# Altium PCB CIU.PcbDoc (part 2 of 2)
Units mil, origin at the board's own origin, x right, y up, seen from the top; angles counter-clockwise.
Board outline 2900 x 1900 mil, 4 copper layers (Layer 1 Signal Power, Layer 2 GND, Layer 3 GND, Layer 4 Signal), stack 23.756 mil thick; 120 components, 69 nets, 401 pads, 201 vias.
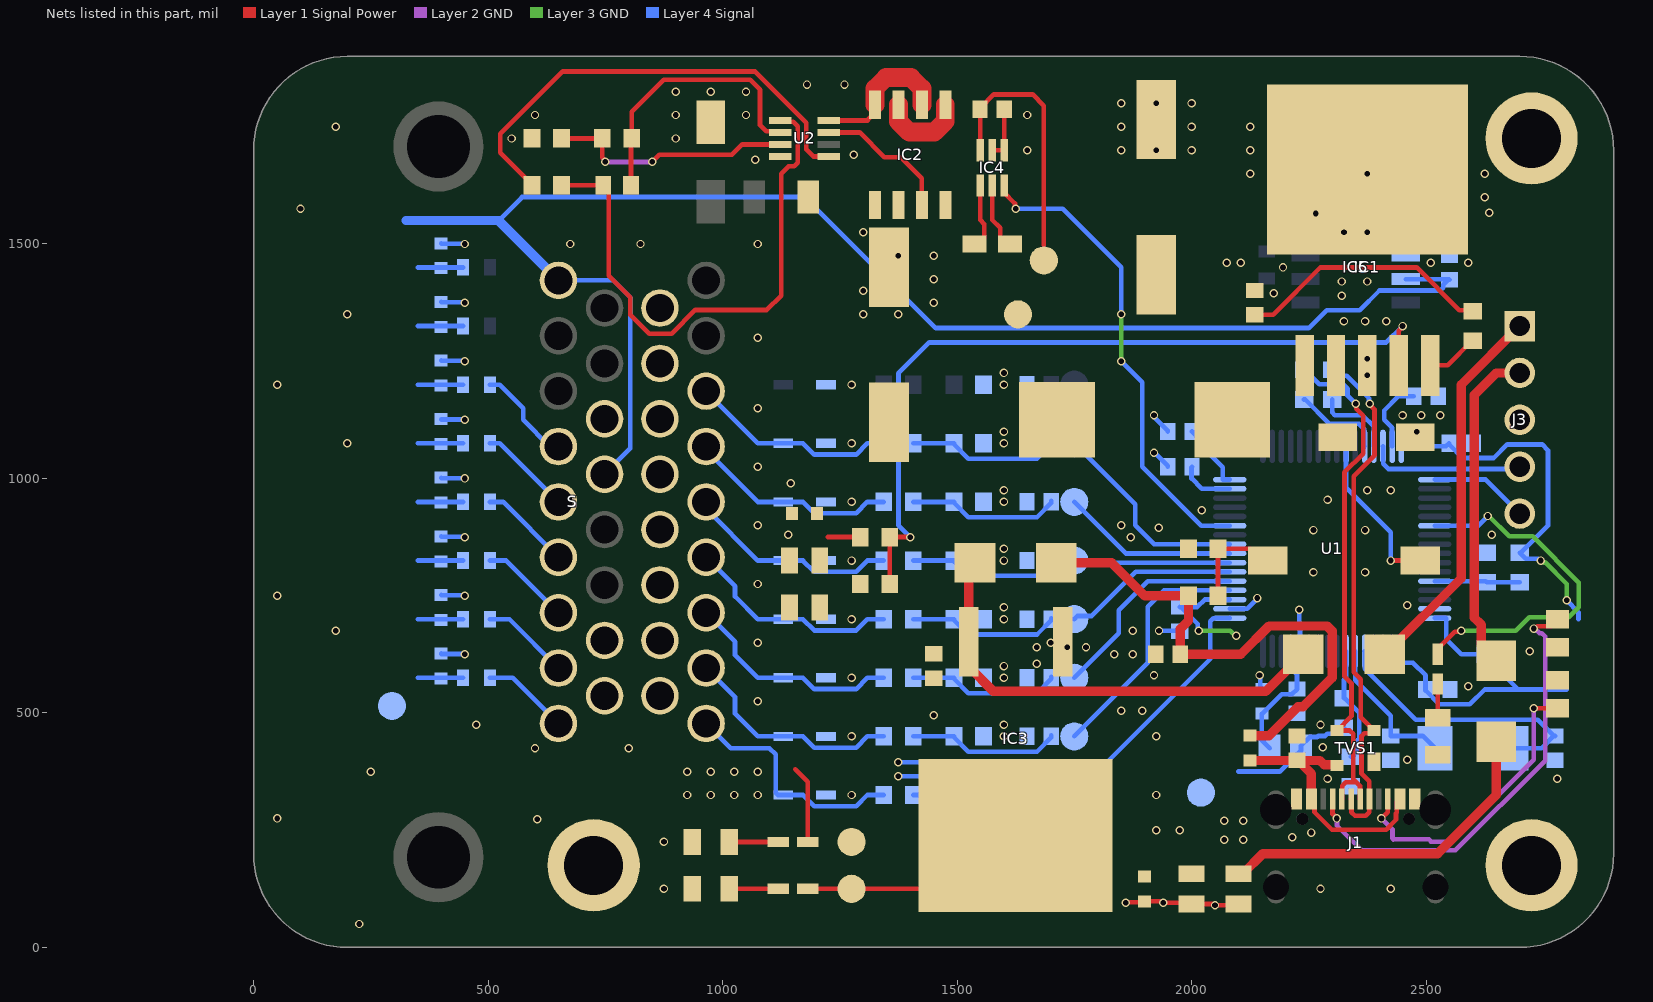
[diagram p4: the nets of this part, all layers, seen from the top]

## Via types
v1: diameter 18, hole 12, Layer 1 Signal Power to Layer 4 Signal, 201 vias

## Nets (pads, with @x,y where several pads share a name; then routed paths per layer and width w, separated by ;. In a path a pad name is that pad's centre, name@x,y a point inside that pad or via, vN(x,y) a via of type N, cw(c..) or ccw(c..) an arc to the next point about the centre after c; other vN are vias at no path point) (continued)
CH1_IN: D3_1.2 R18_1.2 S.3 | length 445.2
  Layer 4 Signal w10: S.3@964.96,1186.22 964.96,1185.04 1075,1075 D3_1.2@1129.25,1075 1171.36,1075 1195.36,1051 1284.94,1051 1308.94,1075 R18_1.2@1343.5,1075
CH1_IN_FLT: C22_1.2 pad.9@1750,1075 R18_1.1 R19_1.2 U1.25 | length 771
  Layer 4 Signal w10: R18_1.1@1406.5,1075 R19_1.2@1493.5,1075 1493.5,1073.03 1524.22,1042.31 1670.46,1042.31 C22_1.2@1700.98,1072.83 ; C22_1.2@1700.98,1075 C22_1.2@1700.98,1077.17 ; pad.9@1750,1075 1880,945 1880,900 1920.16,859.84 U1.25@2081.5,859.84
CH2_A+5V: F4.2 S.29 | length 215.7
  Layer 4 Signal w10: F4.2@503.54,1200 525,1200 575,1150 575,1125 631.89,1068.11 S.29@650,1068.11
CH2_IN: D3_2.2 R18_2.2 S.4 | length 452.1
  Layer 4 Signal w10: S.4@964.96,1068.11 964.96,1060.04 1075,950 D3_2.2@1129.25,950 1171.36,950 1195.36,926 1284.94,926 1308.94,950 R18_2.2@1343.5,950
CH2_IN_FLT: C22_2.2 pad.9@1750,950 R18_2.1 R19_2.2 U1.24 | length 701
  Layer 4 Signal w10: R18_2.1@1406.5,950 R19_2.2@1493.5,950 1493.5,948.03 1524.22,917.31 1670.46,917.31 C22_2.2@1700.98,947.83 ; C22_2.2@1700.98,950 C22_2.2@1700.98,952.17 ; pad.9@1750,950 1859.84,840.16 U1.24@2081.5,840.16
CH3_A+5V: F5.2 S.30 | length 198.2
  Layer 4 Signal w10: F5.2@503.54,1075 525,1075 S.30@650,950
CH3_IN: D3_3.2 R18_3.2 S.5 | length 459
  Layer 4 Signal w10: S.5@964.96,950 964.96,935.04 1075,825 D3_3.2@1129.25,825 1171.36,825 1195.36,801 1284.94,801 1308.94,825 R18_3.2@1343.5,825
CH3_IN_FLT: C22_3.2 pad.9@1750,825 R18_3.1 R19_3.2 U1.23 | length 657.4
  Layer 4 Signal w10: R18_3.1@1406.5,825 R19_3.2@1493.5,825 1493.5,823.03 1524.22,792.31 1670.46,792.31 C22_3.2@1700.98,822.83 ; C22_3.2@1700.98,825 C22_3.2@1700.98,827.17 ; pad.9@1750,825 1754.53,820.47 U1.23@2081.5,820.47
CH4_A+5V: F6.2 S.31 | length 195.4
  Layer 4 Signal w10: F6.2@503.54,950 531.89,950 S.31@650,831.89
CH4_IN: D3_4.2 R18_4.2 S.6 | length 465.9
  Layer 4 Signal w10: S.6@964.96,831.89 1026.68,770.17 1026.68,748.32 1075,700 D3_4.2@1129.25,700 1171.36,700 1195.36,676 1284.94,676 1308.94,700 R18_4.2@1343.5,700
CH4_IN_FLT: C22_4.2 pad.9@1750,700 R18_4.1 R19_4.2 U1.22 | length 697.2
  Layer 4 Signal w10: R18_4.1@1406.5,700 R19_4.2@1493.5,700 1493.5,698.03 1524.22,667.31 1670.46,667.31 C22_4.2@1700.98,697.83 ; C22_4.2@1700.98,700 C22_4.2@1700.98,702.17 ; pad.9@1750,700 1756.82,706.82 1786.82,706.82 1880.79,800.79 U1.22@2081.5,800.79
CH5_A+5V: F7.2 S.32 | length 192.5
  Layer 4 Signal w10: F7.2@503.54,825 538.78,825 S.32@650,713.78
CH5_IN: D3_5.2 R18_5.2 S.7 | length 472.7
  Layer 4 Signal w10: S.7@964.96,713.78 1026.68,652.06 1026.68,623.32 1075,575 D3_5.2@1129.25,575 1171.36,575 1195.36,551 1284.94,551 1308.94,575 R18_5.2@1343.5,575
CH5_IN_FLT: C22_5.2 pad.9@1750,575 R18_5.1 R19_5.2 U1.21 | length 769.6
  Layer 4 Signal w10: R18_5.1@1406.5,575 R19_5.2@1493.5,575 1493.5,573.03 1524.22,542.31 1670.46,542.31 C22_5.2@1700.98,572.83 ; C22_5.2@1700.98,575 C22_5.2@1700.98,577.17 ; pad.9@1750,575 1845,670 1845,719.02 1907.09,781.1 U1.21@2081.5,781.1
CH6_A+5V: F8.2 S.33 | length 189.7
  Layer 4 Signal w10: F8.2@503.54,700 545.67,700 S.33@650,595.67
CH6_IN: D3_6.2 R18_6.2 S.8 | length 479.6
  Layer 4 Signal w10: S.8@964.96,595.67 1026.68,533.95 1026.68,498.32 1075,450 D3_6.2@1129.25,450 1171.36,450 1195.36,426 1284.94,426 1308.94,450 R18_6.2@1343.5,450
CH6_IN_FLT: C22_6.2 pad.9@1750,450 R18_6.1 R19_6.2 U1.20 | length 854.8
  Layer 4 Signal w10: R18_6.1@1406.5,450 R19_6.2@1493.5,450 1493.5,448.03 1524.22,417.31 1670.46,417.31 C22_6.2@1700.98,447.83 ; C22_6.2@1700.98,450 C22_6.2@1700.98,452.17 ; pad.9@1750,450 1906.6,606.6 1906.6,726.6 1941.42,761.42 U1.20@2081.5,761.42
CH7_A+5V: F9.2 S.34 | length 186.8
  Layer 4 Signal w10: F9.2@503.54,575 552.56,575 S.34@650,477.56
CH7_IN: D3_7.2 R18_7.2 S.9 | length 509.7
  Layer 4 Signal w10: S.9@964.96,477.56 1017.52,425 1100,425 1113.09,411.91 1113.09,329.84 1117.93,325 D3_7.2@1129.25,325 1171.36,325 1195.36,301 1284.94,301 1308.94,325 R18_7.2@1343.5,325
CH7_IN_FLT: C22_7.2 pad.9@1750,325 R18_7.1 R19_7.2 U1.17 | length 859
  Layer 4 Signal w10: R18_7.1@1406.5,325 R19_7.2@1493.5,325 1493.5,323.03 1524.22,292.31 1670.46,292.31 C22_7.2@1700.98,322.83 ; C22_7.2@1700.98,325 C22_7.2@1700.98,327.17 ; pad.9@1750,325 2040,615 2040,695.6 2046.42,702.02 2081.15,702.02 U1.17@2081.5,702.36
CURR_SENSE: IC4.6 U1.27 | length 1019.1
  Layer 1 Signal Power w10: IC4.6@1600.59,1625 1600.59,1609.25 1623.47,1586.37 1623.47,1576.53 v1(1625,1575)
  Layer 3 GND w10: v1(1850,1250) v1(1850,1350)
  Layer 4 Signal w10: v1(1625,1575) 1725,1575 1850,1450 v1(1850,1350) ; v1(1850,1250) 1895,1205 1895,1025 2020.79,899.21 U1.27@2081.5,899.21
D+3.3V: C1.2 C2.2 C3.2 C4.2 C5.2 C19.2 C20.2 C21.2 D6.1 FB1.2 IC3.4 LED1.2 pad.9@1275,125 pad.9@2020,330 R3.2 R6.1 U1.1 U1.19 U1.32 U1.48 U1.64 | length 3418.5
  Layer 1 Signal Power w10: LED1.2@1181.5,125 1511.42,125 IC3.4@1625,238.58
  Layer 1 Signal Power w20: C19.2@2100,157.28 2109.45,157.28 2152.17,200 2525,200 2650,325 D6.1@2650,438.39
  Layer 3 GND w10: v1(2015,675) 2082.84,675 2092.84,665 v1(2095,665) ; v1(2745,825) 2747.16,825 2751.16,821 2754,821 2800,775 v1(2800,740)
  Layer 4 Signal w10: C1.2@1975,725.98 C1.2@1977.17,725.98 ; C5.2@2000.98,1100 2012.32,1088.66 2012.32,1077.68 2066.45,1023.55 2066.45,998.47 2067.28,997.64 U1.32@2081.5,997.64 ; v1(2015,675) 2013.47,676.53 2013.47,689.68 C1.2@1977.17,725.98 ; U1.19@2081.5,741.73 2027.87,741.73 2012.12,725.98 C1.2@1977.17,725.98 ; 2100,375 2188.39,375 2233.46,420.08 FB1.2@2233.46,425 2233.46,429.92 2252.09,448.54 2267.6,448.54 2270.06,451 2284.94,451 2289.73,455.79 2312.28,455.79 R3.2@2325,468.5 ; U1.1@2447.64,631.5 2447.64,607.81 2448.47,606.97 2472.17,606.97 2499.02,580.12 C2.2@2499.02,550 2499.02,547.83 2528.35,518.5 2593.5,518.5 2625,550 2696.85,550 ; U1.48@2447.64,1068.5 2542.52,1068.5 C4.2@2549.02,1075 2549.02,1072.83 2578.35,1043.5 2643.95,1043.5 2672.94,1072.48 2747.52,1072.48 2760,1060 2760,899.53 2701.97,841.5 R6.1@2700,841.5 2712.72,828.78 2739.06,828.78 2742.84,825 v1(2745,825) ; U1.64@2518.5,702.36 2542.2,702.36 2543.03,701.53 2543.03,656.97 2575,625 C3.2@2624.02,625 2624.02,622.83 2696.85,550 ; 2800,550 2696.85,550 ; v1(2800,740) 2825,715 2825,700
  other v1: 2070,230 2110,230 2070,270 2110,270
D+3.3V_JTAG: D6.2 J3.2 | length 702.3
  Layer 1 Signal Power w20: D6.2@2650,611.61 2617.68,643.94 2617.68,688.32 2603,703 2603,1178 2650,1225 J3.2@2700,1225
D+5V: C14.1 C15.2 C16.2 C17.2 C18.2 C26.2 C27.2 C28.2 C29.2 C30.2 C31.2 C32.2 C33.2 C35.1 D4.1 D5.1 F2.1 F3.1 F4.1 F5.1 F6.1 F7.1 F8.1 F9.1 IC3.3 IC5.3 L1.2 LED2.2 pad.9@295,515 pad.9@1275,225 R11.2 S.21 S.26 | length 5251
  Layer 1 Signal Power w10: 1155,380 1181.5,353.5 LED2.2@1181.5,225 ; 1225,875 R11.2@1293.5,875
  Layer 1 Signal Power w20: D4.1@1538.39,820 1525,806.61 IC3.3@1525,651.97 1525,598.82 1577.82,546 2158.4,546 2237.4,625 D5.1@2238.39,625
  Layer 4 Signal w10: 350,575 F9.1@446.46,575 ; 350,700 F8.1@446.46,700 ; 350,825 F7.1@446.46,825 ; 350,950 F6.1@446.46,950 ; 350,1075 F5.1@446.46,1075 ; 350,1200 F4.1@446.46,1200 ; 350,1325 F3.1@446.46,1325 ; 350,1450 F2.1@446.46,1450 ; 522.44,1550 572.44,1600 1175,1600 1454.34,1320.66 2250.09,1320.66 2288.43,1359 2359,1359 2400.8,1400.8 2530.64,1400.8 2536.5,1406.65 2536.5,1412.68 2547.83,1424.02 C35.1@2550,1424.02 2549.02,1425 IC5.3@2456.77,1425 ; S.26@650,1422.44 767.15,1422.44 803.43,1386.17 803.43,1064.06 S.21@748.43,1009.06
  Layer 4 Signal w20: 325,1550 522.44,1550 S.26@650,1422.44
  other v1: 925,325 975,325 1025,325 1075,325 925,375 975,375 1025,375 1075,375
D+5V_JTAG: D5.2 J3.1 | length 820
  Layer 1 Signal Power w20: D5.2@2411.61,625 2412.6,625 2575,787.4 2575,1200 J3.1@2700,1325
D+5V_USB: C24.2 D4.2 FB2.2 R22.2 | length 1121.7
  Layer 1 Signal Power w20: D4.2@1711.61,820 1830,820 1900,750 R22.2@1993.5,750 1993.5,696.5 1975.98,678.98 C24.2@1975.98,625 2105,625 2165.32,685.32 2289.15,685.32 2299.69,674.78 2299.69,575.22 2237.87,513.4 2227.12,513.4 2165.29,451.57 FB2.2@2125,451.57
D+12V: C12.1 C13.2 C25.2 IC1.1 IC4.3 IC4.5 pad.9@1685,1465 R7.1 R8.2 | length 1235.4
  Layer 1 Signal Power w10: IC4.3@1549.41,1699.8 1549.41,1787.01 C25.2@1549.02,1787.4 1549.02,1789.57 1578.35,1818.91 1661.09,1818.91 1685,1795 1685,1498 ; IC4.5@1575,1625 1575,1551.19 1591.81,1534.38 1591.81,1513.11 1604.92,1500 R8.2@1612.4,1500 ; C13.2@2135,1349.02 2174.02,1349.02 2275,1450 2480,1450 2571.17,1358.83 2597.67,1358.83 R7.1@2600,1356.5
GND: C1.1 C2.1 C3.1 C4.1 C5.1 C6.1 C7.1 C8.2 C9.2 C10.1 C11.1 C12.2 C13.1 C14.2 C15.1 C16.1 C17.1 C18.1 C19.1 C20.1 C21.1 C22_0.1 C22_1.1 C22_2.1 C22_3.1 C22_4.1 C22_5.1 C22_6.1 C22_7.1 C23.1 C24.1 C25.1 C26.1 C27.1 C28.1 C29.1 C30.1 C31.1 C32.1 C33.1 C35.2 D1.1 D2.2 D3_0.1 D3_1.1 D3_2.1 D3_3.1 D3_4.1 D3_5.1 D3_6.1 D3_7.1 IC1.3 IC1.6 IC3.1 IC4.1 IC4.2 IC5.2 IC5.8 J1.A1-B12 J1.B1-A12 J3.3 pad.8 pad.9@1630,1350 R4.2 R5.1 R13.1 R14.1 R15.1 R16.1 R17.1 R19_0.1 R19_1.1 R19_2.1 R19_3.1 R19_4.1 R19_5.1 R19_6.1 R19_7.1 R20.1 R21.1 R23.2 S.10 S.11 S.12 S.13 S.14 S.15 S.16 S.17 S.20 S.24 S.25 TVS1.1 U1.12 U1.18 U1.63 U2.4 | length 1590.7
  Layer 1 Signal Power w10: IC4.2@1575,1699.8 IC4.1@1600.59,1699.8 1600.59,1787.01 C25.1@1600.98,1787.4 ; v1(1860,95) 1861.53,96.53 1898.11,96.53 C21.1@1900,98.43 1934.41,98.43 1937.84,95 v1(1940,95) 1997.72,95 C20.1@2000,92.72 2045.12,92.72 2047.84,90 v1(2050,90) 2097.28,90 C19.1@2100,92.72
  Layer 4 Signal w10: C33.1@400,626.57 400.79,625.79 449.21,625.79 v1(450,625) ; C32.1@400,751.57 400.79,750.79 449.21,750.79 v1(450,750) ; C31.1@400,876.57 400.79,875.79 449.21,875.79 v1(450,875) ; C30.1@400,1001.57 400.79,1000.79 449.21,1000.79 v1(450,1000) ; C29.1@400,1126.57 400.79,1125.79 449.21,1125.79 v1(450,1125) ; C28.1@400,1251.57 400.79,1250.79 449.21,1250.79 v1(450,1250) ; C27.1@400,1376.57 400.79,1375.79 449.21,1375.79 v1(450,1375) ; C26.1@400,1501.57 400.79,1500.79 449.21,1500.79 v1(450,1500) ; v1(1375,365) 1518.46,365 1556.5,326.97 R19_7.1@1556.5,325 ; v1(1375,395) 1579.02,395 1635.51,338.5 1637.68,338.5 1649.02,327.17 C22_7.1@1649.02,325 ; v1(1920,1055) 1921.18,1055 1949.02,1027.17 C11.1@1949.02,1025 ; v1(1920,1135) 1921.53,1133.47 1921.53,1129.65 1949.02,1102.17 C5.1@1949.02,1100 ; v1(1930.6,675) 1974.02,675 C1.1@1975,674.02 ; U1.18@2081.5,722.05 2081.84,722.39 2118.42,722.39 2140,743.97 v1(2140,745) ; v1(2145,580) 2146.53,578.47 2146.53,555.04 C6.1@2150,551.57 ; v1(2230,720) 2230,689.46 2231.1,688.36 U1.12@2231.1,631.5
  other v1: 225,50 875,125 2275,125 2425,125 875,225 2215,235 2255,245 1925,250 1975,250 604.51,273.21 50,275 1275,325 1925,325 2290,360 2780,360 250,375 2460,400 600,425 800,425 2280,427 1275,450 1600,450 1925,450 475,475 1600,475 2275,475 1450,495 1850,505 1895,505 1075,525 2590,557.24 1275,575 1600,575 1920,580 1600,600 1670,605 1835,625 1875,625 2721.26,631.3 1670,640 1735,640 1775,640 1075,650 1700,650 175,675 1875,675 1275,700 1600,700 1600,725 2460,730 50,750 1075,775 2260,800 2370,800 1275,825 1600,825 1600,850 1870,875 1140,880 2640,880 2260,890 2370,890 1930,895 1075,900 1850,900 2021.97,931.97 1275,950 1600,950 2290,955 1600,975 2375,975 2425,975 1145,990 1075,1025 200,1075 1275,1075 1600,1075 1600,1100 2480,1100 2450,1135 2490,1135 2530,1135 1075,1150 50,1200 1275,1200 1600,1200 2375,1220 1600,1225 2375,1255 1075,1300 2325,1335 2370,1335 2415,1335 200,1350 1300,1350 1375,1350 1450,1375 2320,1390 2175,1395 1300,1400 2320,1420 2375,1420 1450,1425 2195,1450 2075,1460 2105,1460 2510,1460 2590,1460 1375,1475 1450,1475 675,1500 825,1500 1075,1500 1300,1525 2325,1525 2375,1525 2265,1565 2634.93,1567 100,1575 2625,1600 2125,1650 2375,1650 2625,1650 1070,1680 1280,1690 1650,1700 1850,1700 1925,1700 2000,1700 2125,1700 550,1725 900,1725 175,1750 1850,1750 2000,1750 2125,1750 600,1775 900,1775 1050,1775 1650,1775 1850,1800 1925,1800 2000,1800 900,1825 975,1825 1050,1825 1180,1840 1260,1840
NetC6_2: C6.2 C7.2 FB1.1 U1.13 | length 263.2
  Layer 4 Signal w10: FB1.1@2166.54,425 2150,441.54 C6.2@2150,498.43 2150.98,498.43 2192.2,539.65 2213.66,539.65 C7.2@2225,550.98 2225,581.33 2211.76,594.57 2211.76,631.15 U1.13@2211.42,631.5
NetC8_1: C8.1 U1.5 X1.2 | length 605.2
  Layer 4 Signal w10: U1.5@2368.9,631.5 2369.24,631.15 2369.24,594.57 2478.57,485.24 2738.57,485.24 C8.1@2772.83,450.98 ; X1.2@2680.71,425 2746.85,425 C8.1@2772.83,450.98 ; C8.1@2775,450.98 C8.1@2772.83,450.98
NetC9_1: C9.1 U1.6 X1.1 | length 317
  Layer 4 Signal w10: U1.6@2349.21,631.5 2349.21,569.79 2425,494.01 C9.1@2425,450.98 2493.31,450.98 X1.1@2519.29,425
NetC10_2: C10.2 U1.47 | length 158.9
  Layer 4 Signal w10: U1.47@2427.95,1068.5 2427.61,1068.85 2427.61,1108.45 2411,1125.06 2411,1144.94 2441.06,1175 C10.2@2474.02,1175
NetC11_2: C11.2 U1.31 | length 116
  Layer 4 Signal w10: C11.2@2000.98,1025 2000,1024.02 2000,1000 2022.05,977.95 U1.31@2081.5,977.95
NetD2_1: D2.1 IC1.2 L1.1
NetF1_1: F1.1 IC2.5 IC2.6 R9.2 R10.2 U2.1 | length 1186.3
  Layer 1 Signal Power w10: R10.2@656.5,1625 R9.2@745.47,1625 757.2,1613.27 757.2,1432.39 803.43,1386.17 803.43,1348.71 843.75,1308.39 891.23,1308.39 942.18,1359.33 1094.33,1359.33 1125,1390 1125,1650 1140.74,1665.74 1152.83,1665.74 1160.44,1673.36 1160.44,1751.05 1150.98,1760.51 1126.3,1760.51 U2.1@1123.43,1763.39
NetIC1_4: IC1.4 R11.1 R14.2 | length 1706.9
  Layer 1 Signal Power w10: R14.2@1356.5,775 R11.1@1356.5,875 v1(1400,875) ; IC1.4@2441.93,1241.34 2441.93,1315.45 2450,1323.52 v1(2450,1325)
  Layer 4 Signal w10: v1(1400,875) 1375,900 1375,1224.29 1440.71,1290 2415,1290 v1(2450,1325)
NetIC1_5: IC1.5 R7.2 | length 112.7
  Layer 1 Signal Power w10: IC1.5@2508.86,1241.34 2545.87,1241.34 2598.03,1293.5 R7.2@2600,1293.5
NetIC2_1: IC2.1 IC2.3 | length 189
  Layer 1 Signal Power w40: IC2.3@1375,1796.77 1375,1761.98 1398.43,1738.54 1451.57,1738.54 1475,1761.98 IC2.1@1475,1796.77
NetIC2_2: IC2.2 IC2.4 U2.8 | length 311.3
  Layer 1 Signal Power w10: U2.8@1226.57,1763.39 1308.84,1763.39 1325,1779.55 IC2.4@1325,1796.77
  Layer 1 Signal Power w40: IC2.4@1325,1796.77 1325,1831.57 1348.43,1855 1401.57,1855 1425,1831.57 IC2.2@1425,1796.77
NetJ1_A5: J1.A5 R20.2 | length 958.8
  Layer 1 Signal Power w10: J1.A5@2300.79,316.34 2300.79,284.55 2310,275.34 v1(2310,275) ; v1(2730,680) 2732.16,680 2737.01,684.84 2765.31,684.84 R20.2@2780,699.53
  Layer 2 GND w10: v1(2310,275) 2310,260 2362.73,207.27 2562.73,207.27 2754,398.54 2754,662.99 2746.93,670.06 2742.11,670.06 2732.16,680 v1(2730,680)
NetJ1_B5: J1.B5 R21.2 | length 636.2
  Layer 1 Signal Power w10: v1(2405,275) 2405,275.2 2418.12,288.32 2418.12,315.56 J1.B5@2418.9,316.34 ; v1(2730,510) 2779.53,510 R21.2@2780,510.47
  Layer 2 GND w10: v1(2405,275) 2428.47,251.53 2428.47,232.8 2430,231.27 ; 2430,230 2430.64,230.64 2506.3,230.64 2510,226.94 2510,226.3 ; 2510,225.27 2555.27,225.27 2730,400 v1(2730,510)
NetLED1_1: LED1.1 R15.2 | length 104.1
  Layer 1 Signal Power w10: R15.2@1014.37,125 LED1.1@1118.5,125
NetLED2_1: LED2.1 R16.2 | length 104.1
  Layer 1 Signal Power w10: R16.2@1014.37,225 LED2.1@1118.5,225
NetLED3_1: "D2 LED.1" R17.2 | length 72.6
  Layer 1 Signal Power w10: R17.2@2525,489.37 2525,562.01
NetLED3_2: "D2 LED.2" U1.54 | length 776.9
  Layer 1 Signal Power w10: 2525,625 2525,636.81 2561.66,673.47 2573.47,673.47 v1(2575,675)
  Layer 3 GND w10: v1(2575,675) 2691.06,675 2720.06,704 2804,704 2825.86,725.86 2825.86,778.08 2727.24,876.71 2677.24,876.71 2633.94,920 v1(2632,920)
  Layer 4 Signal w10: U1.54@2518.5,899.21 2611.77,899.21 2632,919.44 v1(2632,920)
NetR3_1: R3.1 R5.2 U1.7 | length 250
  Layer 4 Signal w10: U1.7@2329.53,631.5 2329.53,575.11 2325,570.58 R3.1@2325,531.5 2326.97,531.5 2357.69,500.78 2357.69,445.4 2354.69,442.4 2354.69,419.21 2341.97,406.5 R5.2@2340,406.5
NetR4_1: R4.1 R6.2 U1.60 | length 182.6
  Layer 4 Signal w10: U1.60@2518.5,781.1 2627.4,781.1 R4.1@2630,778.5 R6.2@2700,778.5
NetR9_1: R9.1 R12.2 U2.2 | length 593.2
  Layer 1 Signal Power w10: R9.1@804.53,1625 804.53,1723.03 R12.2@806.5,1725 806.5,1781.5 875,1850 1058.94,1850 1080,1828.94 1080,1753.6 1093.06,1740.54 1120.68,1740.54 U2.2@1123.43,1737.8
NetR10_1: R10.1 U2.5 | length 1002.2
  Layer 1 Signal Power w10: R10.1@593.5,1625 593.5,1626.97 526,1694.47 526,1734.94 659.06,1868 1069.09,1868 1178.44,1758.64 1178.44,1701.56 1193.39,1686.61 U2.5@1226.57,1686.61
NetR12_1: R12.1 R13.2 U2.3 | length 528.5
  Layer 1 Signal Power w10: R13.2@656.5,1725 R12.1@743.5,1725 743.5,1683.66 750,1677.16 v1(750,1675) ; v1(850,1675) 865,1690 1020,1690 1042.2,1712.2 U2.3@1123.43,1712.2
  Layer 2 GND w10: v1(750,1675) v1(850,1675)
NetR22_1: R22.1 R23.1 S1.2 | length 216.5
  Layer 1 Signal Power w10: R22.1@2056.5,750 R23.1@2056.5,850 2124.8,850 2149.8,825 S1.2@2162.6,825
SWCLK: J3.5 U1.49 | length 211.6
  Layer 4 Signal w10: U1.49@2518.5,997.64 2627.36,997.64 J3.5@2700,925
SWDIO: J3.4 U1.46 | length 335.3
  Layer 4 Signal w10: U1.46@2408.27,1068.5 2408.61,1068.16 2408.61,1031.58 2420.12,1020.07 2695.07,1020.07 J3.4@2700,1025
USB1_D_N: J1.A7 J1.B7 R1.1 TVS1.3 | length 1131.6
  Layer 1 Signal Power w10: J1.B7@2320.47,316.34 2321.25,317.12 2321.25,344.36 2328.87,351.98 2351.45,351.98 ; v1(2350,1158.94) 2351.53,1157.41 2351.53,1148.47 2366.15,1133.85 2366.15,1052.95 2326,1012.8 2326,578.32 2341,563.32 2341,492.77 TVS1.3@2310.63,462.4 2337.6,462.4 2344.59,455.41 2344.59,358.83 2351.45,351.98 ; J1.A7@2359.84,316.34 2359.06,317.12 2359.06,344.36 2351.45,351.98
  Layer 4 Signal w10: R1.1@2240,1231.5 2241.97,1231.5 2272.69,1200.78 2323.51,1200.78 2332.69,1191.61 2332.69,1176.25 v1(2350,1158.94)
USB1_D_P: J1.A6 J1.B6 R2.1 TVS1.2 | length 1127
  Layer 1 Signal Power w10: J1.A6@2340.16,316.34 2340.94,315.56 2340.94,288.32 2348.55,280.7 2371.13,280.7 2378.75,288.32 2378.75,315.56 J1.B6@2379.53,316.34 2379.02,316.85 2379.02,353.98 2362.59,370.4 2362.59,450.66 2368.45,456.52 2383.49,456.52 TVS1.2@2389.37,462.4 2361,490.77 2361,571.6 2346,586.6 2346,1004.52 2390,1048.52 2390,1147.21 2380,1157.21 v1(2380,1159.38)
  Layer 4 Signal w10: R2.1@2300,1231.5 2312.72,1218.78 2330.97,1218.78 2378.47,1171.28 2378.47,1160.91 v1(2380,1159.38)
USB2_D_N: R1.2 U1.44 | length 191.7
  Layer 4 Signal w10: R1.2@2240,1168.5 2241.97,1168.5 2293.54,1116.94 2357.04,1116.94 2368.55,1105.43 2368.55,1068.85 U1.44@2368.9,1068.5
USB2_D_P: R2.2 U1.45 | length 171
  Layer 4 Signal w10: R2.2@2300,1168.5 2300,1140.8 2305.86,1134.94 2364.5,1134.94 2388.24,1111.2 2388.24,1068.85 U1.45@2388.58,1068.5
USB_VBUS: S1.1 U1.42 | length 345.5
  Layer 1 Signal Power w10: v1(2425,825) S1.1@2487.4,825
  Layer 4 Signal w10: U1.42@2329.53,1068.5 2329.53,980.56 2425,885.09 v1(2425,825)
V_out: IC2.7 IC2.8 IC4.4 R8.1 U2.7 | length 437.3
  Layer 1 Signal Power w10: U2.7@1226.57,1737.8 1292.2,1737.8 1345,1685 1380,1685 1425,1640 IC2.7@1425,1583.23 ; R8.1@1537.6,1500 1545.08,1500 1558.19,1513.11 1558.19,1542.54 1549.41,1551.32 IC4.4@1549.41,1625
VBUS: C23.2 FB2.1 J1.A4-B9 J1.B4-A9 TVS1.4 | length 560.9
  Layer 1 Signal Power w10: J1.A4-B9@2255.51,316.34 2262.2,309.65 2262.2,288.32 2299.51,251 2414.94,251 2435.98,272.04 2435.98,285.53 2437.8,287.35 2437.8,309.65 J1.B4-A9@2444.49,316.34
  Layer 1 Signal Power w20: FB2.1@2125,398.43 2125.3,398.72 C23.2@2227.46,398.72 ; J1.A4-B9@2255.51,316.34 2255.51,370.67 C23.2@2227.46,398.72 ; TVS1.4@2310.63,387.6 2308.82,389.41 2282.82,389.41 2273.5,398.72 C23.2@2227.46,398.72
pads on no net: IC5.5 J1. J1.1 J1.2 J1.3 J1.4 J1.A8 J1.B8 S.35 S.36 U1.2 U1.3 U1.4 U1.8 U1.9 U1.10 U1.11 U1.14 U1.15 U1.16 U1.28 U1.29 U1.30 U1.33 U1.34 U1.35 U1.36 U1.37 U1.38 U1.39 U1.40 U1.41 U1.43 U1.50 U1.51 U1.52 U1.53 U1.55 U1.56 U1.57 U1.58 U1.59 U2.6

## Polygon pours and split planes (outlines as drawn)
GND on Layer 3 GND "GND_L03_P001" (solid, remove dead copper, pour order 1): 0,1900 0,0 2900,0 2900,1900
GND on Layer 3 GND "GND_L03_P000" (solid, remove dead copper, pour order 0): 0,0 2900,0 2900,1900 0,1900
D+5V on Layer 1 Signal Power "D+5V_L01_P016" (solid, remove dead copper, pour order 16): 1150,650 1175,675 1175,1300 1900,1300 1900,950 1275,950 1250,925 1250,675 1400,675 1425,650 1475,650 1500,675 1500,725 1550,725 1550,575 1500,575 1475,600 1225,600 1200,575 1200,400 1100,300 900,300 875,325 875,375 900,400 1025,400 1100,475 1100,625 1125,650
D+3.3V on Layer 1 Signal Power "D+3.3V_L01_P033" (solid, remove dead copper, pour order 33): 2025,175 2050,200 2050,300 2075,325 2125,325 2150,300 2150,150 2125,125 1875,125 1850,100 1850,25 1400,25 1400,400 1850,400 1850,200 1875,175
GND on Layer 1 Signal Power "GND_L01_P034" (solid, remove dead copper, pour order 34): 0,1900 0,0 2900,0 2900,1900
D+3.3V on Layer 1 Signal Power "D+3.3V_L01_P005" (solid, remove dead copper, pour order 5): 1225,100 1250,75 1300,75 1325,100 1325,150 1150,150 1150,100
D+5V on Layer 1 Signal Power "D+5V_L01_P008" (solid, remove dead copper, pour order 8): 1225,250 1250,275 1300,275 1325,250 1325,200 1225,200 1150,200 1150,250
NetD2_1 on Layer 1 Signal Power "NETD2_1_L01_P017" (solid, remove dead copper, pour order 17): 2275,1306.3 2400,1306.3 2400,1000 2350,950 1900,950 1900,1300 2075,1300 2200,1175 2275,1175
NetF1_1 on Layer 1 Signal Power "NETF1_1_L01_P019" (solid, remove dead copper, pour order 19): 1125,1550 1400,1550 1400,1650 1125,1650
BAT on Layer 1 Signal Power "BAT_L01_P018" (solid, remove dead copper, pour order 18): 875,1625 900,1650 1125,1650 1125,1550 1025,1550 1025,1400 1000,1375 925,1375 875,1425 875,1550
V_out on Layer 1 Signal Power "V_OUT_L01_P015" (solid, remove dead copper, pour order 15): 1500,1625 1500,1550 1525,1525 1575,1525 1575,1475 1475,1475 1400,1550 1400,1650 1475,1650
D+12V on Layer 1 Signal Power "D+12V_L01_P020" (solid, remove dead copper, pour order 20): 1625,1405 1720,1405 1825,1300 2075,1300 2198.62,1176.38 2275,1176.38 2275,1325 2200,1325 2150,1375 2125,1375 1975,1525 1575,1525 1575,1455
GND on Layer 4 Signal "GND_L04_P032" (solid, remove dead copper, pour order 32): 0,1900 0,0 2900,0 2900,1900
D+3.3V on Layer 4 Signal "D+3.3V_L04_P031" (solid, remove dead copper, pour order 31): 2050,202.64 1950,302.64 1950,470 2050,570 2050,650 2150,750 2150,975 2050,1075 1975,1075 1975,1125 2100,1125 2225,1000 2225,725 2125,625 2125,325 2150,300 2150,250 2175,225 2520,225 2635,340 2790,340 2825,375 2825,475 2823.61,475 2773.61,525 2750,525 2725,550 2725,575 2775,625 2775,725 2800,750 2850,750 2875,725 2875,350 2810,285 2660,285 2550,175 2077.64,175
CH5_IN_FLT on Layer 4 Signal "CH5_IN_FLT_L04_P023" (solid, remove dead copper, pour order 23): 1800,525 1825,550 1825,600 1800,625 1725,625 1700,600 1700,550 1725,525
CH6_IN_FLT on Layer 4 Signal "CH6_IN_FLT_L04_P022" (solid, remove dead copper, pour order 22): 1800,400 1825,425 1825,475 1800,500 1725,500 1700,475 1700,425 1725,400
CH7_IN_FLT on Layer 4 Signal "CH7_IN_FLT_L04_P021" (solid, remove dead copper, pour order 21): 1800,275 1825,300 1825,350 1800,375 1725,375 1700,350 1700,300 1725,275
CH4_IN_FLT on Layer 4 Signal "CH4_IN_FLT_L04_P025" (solid, remove dead copper, pour order 25): 1800,650 1825,675 1825,725 1800,750 1725,750 1700,725 1700,675 1725,650
CH3_IN_FLT on Layer 4 Signal "CH3_IN_FLT_L04_P026" (solid, remove dead copper, pour order 26): 1800,775 1825,800 1825,850 1800,875 1725,875 1700,850 1700,800 1725,775
CH2_IN_FLT on Layer 4 Signal "CH2_IN_FLT_L04_P027" (solid, remove dead copper, pour order 27): 1800,900 1825,925 1825,975 1800,1000 1725,1000 1700,975 1700,925 1725,900
CH1_IN_FLT on Layer 4 Signal "CH1_IN_FLT_L04_P028" (solid, remove dead copper, pour order 28): 1800,1025 1825,1050 1825,1100 1800,1125 1725,1125 1700,1100 1700,1050 1725,1025
CH0_IN_FLT on Layer 4 Signal "CH0_IN_FLT_L04_P029" (solid, remove dead copper, pour order 29): 1800,1150 1825,1175 1825,1225 1800,1250 1725,1250 1700,1225 1700,1175 1725,1150
D+5V on Layer 4 Signal "D+5V_L04_P030" (solid, remove dead copper, pour order 30): 375,500 475,400 1075,400 1100,375 1100,325 1075,300 400,300 225,475 225,1550 250,1575 350,1575 375,1550
GND on Layer 2 GND "GND_L02_P002" (solid, remove dead copper, pour order 2): 0,1900 0,0 2900,0 2900,1900

## Keep-outs
Keep-Out Layer:
  the board outline again, w30

## Other copper
Layer 1 Signal Power:
  pour cut-out: 1563.19,1518.11 1563.19,1525 1586.81,1525 1586.81,1475 1563.19,1475 1563.19,1481.89

## Silkscreen, mask and mechanical layers (free items; w line width, h text height)
Top Overlay:
  text "D+12V" at 1660,1395 h45
  text "GND" at 1680,1340.5 h45
  text "D+5V" at 1225,260.5 h45
  text "D+3.3V" at 1225,60.5 h45
Bottom Overlay:
  text "CIU / Formula UBC SAE /  / Aidan Quandt" at 1305,1540 h100
  text "CH0" at 1875,1185.62 h45
  text "CH1" at 1875,1060.62 h45
  text "CH2" at 1875,935.62 h45
  text "CH3" at 1875,810.62 h45
  text "CH4" at 1875,685.62 h45
  text "CH5" at 1875,560.62 h45
  text "D+5V" at 275,555.5 h45
  text "CH6" at 1875,435.62 h45
  text "D+3.3V" at 2000,370.5 h45
  text "CH7" at 1875,310.62 h45
  text "CHN_IN*(R18/(R18+R19)) < 3.3V or no bueno" at 1755,132.49 h45